# EAGLE board Quad (EAGLE 9.5.1)
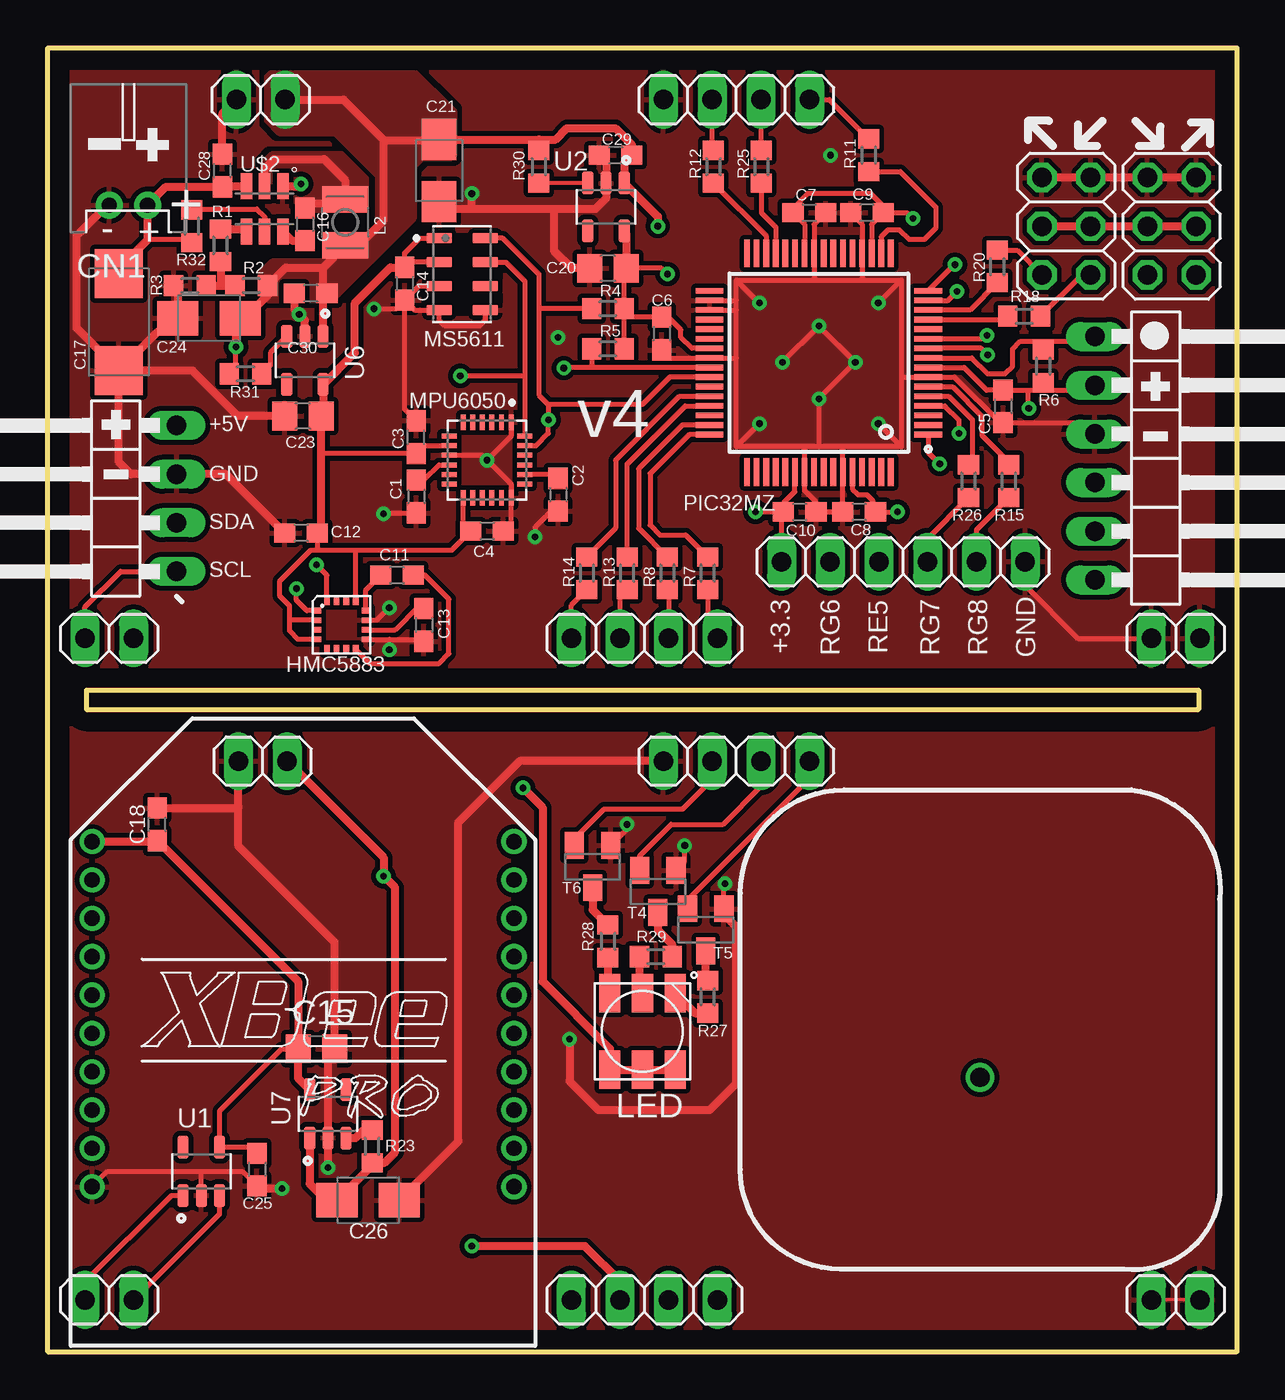
[diagram p0: board, top side]
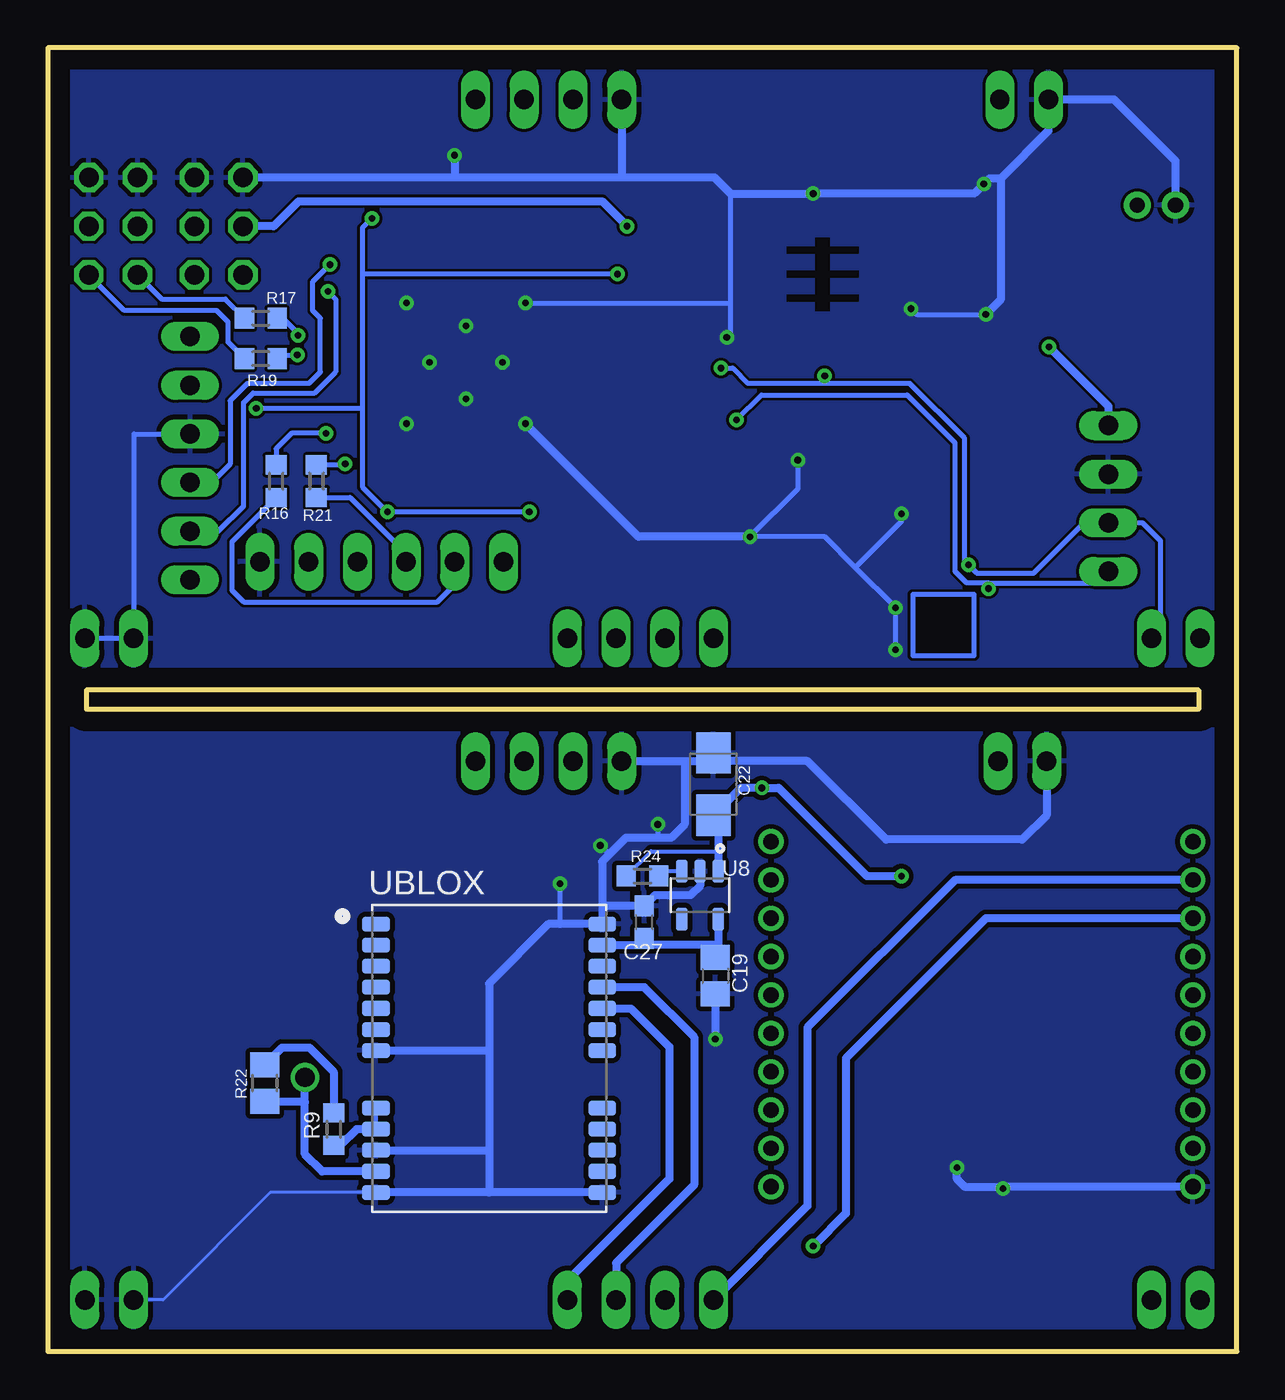
[diagram p1: board, bottom side, seen from below]

Size 62 x 68 mm. Coordinates in mm from the lower left corner, seen from the top.
Outline: 0,0 0,68 62,68 62,0 0,0
Outline: 2,34.5 60,34.5 60,33.5 2,33.5 2,34.5
Copper layers (1*16): Top 0.035mm / dielectric 1.5mm / Bottom 0.035mm
Design rules "default": minimum track width 6mil, minimum drill 0.35mm, track to track 6mil, track to pad 6mil, pad to pad 6mil, via to via 6mil, smd to smd 6mil, copper to edge 40mil, drill to drill 6mil, minimum pad ring 10mil, minimum via ring 8mil, stop-mask expansion 4mil, vias tented up to drill 0mil, thermal gap 10mil

## Footprints (pad centres in the part's own frame; a part is rotated, then mirrored left to right if it is on the bottom)
C0603 = smd 1.1 x 1: 1 -0.85,0; 2 0.85,0
C0805 = smd 1.3 x 1.5: 1 -0.95,0; 2 0.95,0
C/6032-28R = smd 2.55 x 2.5: + 2.525,0; - -2.525,0
B/3528-21W = smd 2.15 x 1.8: + 1.625,0; - -1.625,0
JST-PH-2-THM-RA = drill 0.8 pad 1.422: 1 1,0; 2 -1,0
LPCC-16 = smd 0.45 x 0.3: 1 -1.275,0.75; 2 -1.275,0.25; 3 -1.275,-0.25; 4 -1.275,-0.75; 9 1.275,-0.75; 10 1.275,-0.25; 11 1.275,0.25; 12 1.275,0.75 | smd 0.3 x 0.45: 5 -0.75,-1.275; 6 -0.25,-1.275; 7 0.25,-1.275; 8 0.75,-1.275; 13 0.75,1.275; 14 0.25,1.275; 15 -0.25,1.275; 16 -0.75,1.275
1X04 = drill 1.016 long: 1 -3.81,0; 2 -1.27,0; 3 1.27,0; 4 3.81,0
1X02 = drill 1.016 long: 1 -1.27,0; 2 1.27,0
1X06/90 = drill 1.016 long: 1 -6.35,-3.81; 2 -3.81,-3.81; 3 -1.27,-3.81; 4 1.27,-3.81; 5 3.81,-3.81; 6 6.35,-3.81
2X03 = drill 1.016 octagon: 1 -2.54,-1.27; 2 -2.54,1.27; 3 0,-1.27; 4 0,1.27; 5 2.54,-1.27; 6 2.54,1.27
1X06 = drill 1.016 long: 1 -6.35,0; 2 -3.81,0; 3 -1.27,0; 4 1.27,0; 5 3.81,0; 6 6.35,0
1X04/90 = drill 1.016 long: 1 -3.81,-3.81; 2 -1.27,-3.81; 3 1.27,-3.81; 4 3.81,-3.81
L2825P = smd 1.4 x 2.4: 1 -1.2,0; 2 1.2,0
RGBLED5050 = smd 2 x 1.1: 1 -2,1.7; 2 -2,0; 3 -2,-1.7; 4 2,-1.7; 5 2,0; 6 2,1.7
QFN50P400X400X95-24N = smd 0.79 x 0.26: 1 -1.97,1.25; 2 -1.97,0.75; 3 -1.97,0.25; 4 -1.97,-0.25; 5 -1.97,-0.75; 6 -1.97,-1.25; 13 1.97,-1.25; 14 1.97,-0.75; 15 1.97,-0.25; 16 1.97,0.25; 17 1.97,0.75; 18 1.97,1.25 | smd 0.26 x 0.79: 7 -1.25,-1.97; 8 -0.75,-1.97; 9 -0.25,-1.97; 10 0.25,-1.97; 11 0.75,-1.97; 12 1.25,-1.97; 19 1.25,1.97; 20 0.75,1.97; 21 0.25,1.97; 22 -0.25,1.97; 23 -0.75,1.97; 24 -1.25,1.97
SON125P500X300X100-8N = smd 1.31 x 0.53: 1 -1.2,1.875; 2 -1.2,0.625; 3 -1.2,-0.625; 4 -1.2,-1.875; 5 1.2,-1.875; 6 1.2,-0.625; 7 1.2,0.625; 8 1.2,1.875
QFP50P1200X1200X120-64N = smd 1.45 x 0.3: 1 -5.7,3.75; 2 -5.7,3.25; 3 -5.7,2.75; 4 -5.7,2.25; 5 -5.7,1.75; 6 -5.7,1.25; 7 -5.7,0.75; 8 -5.7,0.25; 9 -5.7,-0.25; 10 -5.7,-0.75; 11 -5.7,-1.25; 12 -5.7,-1.75; 13 -5.7,-2.25; 14 -5.7,-2.75; 15 -5.7,-3.25; 16 -5.7,-3.75; 33 5.7,-3.75; 34 5.7,-3.25; 35 5.7,-2.75; 36 5.7,-2.25; 37 5.7,-1.75; 38 5.7,-1.25; 39 5.7,-0.75; 40 5.7,-0.25; 41 5.7,0.25; 42 5.7,0.75; 43 5.7,1.25; 44 5.7,1.75; 45 5.7,2.25; 46 5.7,2.75; 47 5.7,3.25; 48 5.7,3.75 | smd 0.3 x 1.45: 17 -3.75,-5.7; 18 -3.25,-5.7; 19 -2.75,-5.7; 20 -2.25,-5.7; 21 -1.75,-5.7; 22 -1.25,-5.7; 23 -0.75,-5.7; 24 -0.25,-5.7; 25 0.25,-5.7; 26 0.75,-5.7; 27 1.25,-5.7; 28 1.75,-5.7; 29 2.25,-5.7; 30 2.75,-5.7; 31 3.25,-5.7; 32 3.75,-5.7; 49 3.75,5.7; 50 3.25,5.7; 51 2.75,5.7; 52 2.25,5.7; 53 1.75,5.7; 54 1.25,5.7; 55 0.75,5.7; 56 0.25,5.7; 57 -0.25,5.7; 58 -0.75,5.7; 59 -1.25,5.7; 60 -1.75,5.7; 61 -2.25,5.7; 62 -2.75,5.7; 63 -3.25,5.7; 64 -3.75,5.7
R0603 = smd 1 x 1.1: 1 -0.85,0; 2 0.85,0
R0805 = smd 1.3 x 1.5: 1 -0.95,0; 2 0.95,0
SOT23-EBC = smd 1 x 1.4: B 0.95,-1.1; C 0,1.1; E -0.95,-1.1
SOT95P280X145-5N = smd 1.21 x 0.59: 1 -1.255,0.95; 2 -1.255,0; 3 -1.255,-0.95; 4 1.255,-0.95; 5 1.255,0.95
SOT95P280X140-6N = smd 1.35 x 0.6: 1 -1.185,0.95; 2 -1.185,0; 3 -1.185,-0.95; 4 1.185,-0.95; 5 1.185,0; 6 1.185,0.95
XCVR_NEO-6M-GPS = smd 1.44 x 0.79: 1 -5.895,7; 2 -5.895,5.9; 3 -5.895,4.8; 4 -5.895,3.7; 5 -5.895,2.6; 6 -5.895,1.5; 7 -5.895,0.4; 8 -5.895,-2.6; 9 -5.895,-3.7; 10 -5.895,-4.8; 11 -5.895,-5.9; 12 -5.895,-7; 13 5.895,-7; 14 5.895,-5.9; 15 5.895,-4.8; 16 5.895,-3.7; 17 5.895,-2.6; 18 5.895,0.4; 19 5.895,1.5; 20 5.895,2.6; 21 5.895,3.7; 22 5.895,4.8; 23 5.895,5.9; 24 5.895,7
XBEE-PRO = drill 0.8 pad 1.27: 1 -11,9; 2 -11,7; 3 -11,5; 4 -11,3; 5 -11,1; 6 -11,-1; 7 -11,-3; 8 -11,-5; 9 -11,-7; 10 -11,-9; 11 11,-9; 12 11,-7; 13 11,-5; 14 11,-3; 15 11,-1; 16 11,1; 17 11,3; 18 11,5; 19 11,7; 20 11,9

## Placement (x,y rotation side)
C1  0.1uF  [C0603]  19.2,44.6 270 top
C2  2.2nF  [C0603]  26.6,44.7 270 top
C3  10nF  [C0603]  19.2,47.7 90 top
C4  0.1uF  [C0603]  22.9,42.8 0 top
C5  0.1uF  [C0603]  49.8,49.3 270 top
C6  0.1uF  [C0603]  32,53.1 270 top
C7  0.1uF  [C0603]  39.7,59.4 0 top
C8  0.1uF  [C0603]  42.3,43.8 180 top
C9  0.1uF  [C0603]  42.7,59.4 180 top
C10  0.1uF  [C0603]  39.2,43.8 0 top
C11  0.22uF  [C0603]  18.2,40.5 180 top
C12  0.1uF  [C0603]  13.2,42.7 180 top
C13  4.7uF  [C0603]  19.6,37.9 270 top
C14  0.1uF  [C0603]  18.6,55.7 270 top
C15  [C0805]  14,15.8 0 top
C16  0.1uF  [C0603]  13.4,58.8 270 top
C17  [C/6032-28R]  3.7,53.7 90 top
C18  0.1uF  [C0603]  5.7,27.5 90 top
C19  [C0805]  27.2,19.6 270 bottom
C20  [C0805]  29.2,56.5 180 top
C21  [B/3528-21W]  20.4,61.6 90 top
C22  [B/3528-21W]  27.3,29.6 270 bottom
C23  [C0805]  13.3,48.8 180 top
C24  [B/3528-21W]  8.4,53.9 0 top
C25  0.1uF  [C0603]  10.9,9.5 270 top
C26  [B/3528-21W]  16.7,7.9 180 top
C27  0.1uF  [C0603]  30.9,22.4 90 bottom
C28  0.1uF  [C0603]  9.1,61.6 90 top
C29  0.1uF  [C0603]  29.6,62.4 180 top
C30  0.1uF  [C0603]  13.7,55.2 180 top
CN1  [JST-PH-2-THM-RA]  4.2,59.8 0 top
HMC5883  HMC5883L  [LPCC-16]  15.3,37.9 0 top
JP1  [1X04]  31.1,2.7 0 top
JP2  [1X02]  3.2,37.2 180 top
JP3  [1X06/90]  58.4,46.6 270 top
JP4  [2X03]  53.1,58.7 90 top
JP5  [2X03]  58.6,58.7 90 top
JP8  [1X04]  35.9,30.8 180 top
JP9  [1X04]  35.9,65.3 180 top
JP10  [1X02]  11.1,65.3 180 top
JP11  [1X04]  31.1,37.2 0 top
JP12  [1X02]  3.2,2.7 180 top
JP13  [1X02]  11.2,30.8 180 top
JP14  [1X02]  58.8,2.7 0 top
JP15  [1X02]  58.8,37.2 0 top
JP16  [1X06]  44.6,41.2 180 top
JP17  [1X04/90]  2.9,44.5 90 top
L2  4.7uH  [L2825P]  15.5,58.9 90 top
LED  RGBLED5050  [RGBLED5050]  31,16.7 90 top
MPU6050  MPU-6050  [QFN50P400X400X95-24N]  22.9,46.5 270 top
MS5611  MS561101BA03-50  [SON125P500X300X100-8N]  21.6,56.2 0 top
PIC32MZ  PIC32MZ2048EFH064-I/PT  [QFP50P1200X1200X120-64N]  40.2,51.58 180 top
R1  75k  [R0603]  9,57.7 270 top
R2  41k  [R0603]  10.6,55.6 0 top
R3  7.6k  [R0603]  7.4,55.6 0 top
R4  4.7k  [R0603]  29.2,54.4 0 top
R5  4.7k  [R0603]  29.2,52.3 0 top
R6  1k  [R0603]  51.9,51.4 270 top
R7  33  [R0603]  34.4,40.6 90 top
R8  33  [R0603]  32.3,40.6 90 top
R9  22  [R0603]  47.1,11.6 90 bottom
R11  33  [R0603]  42.8,62.4 90 top
R12  33  [R0603]  34.7,61.8 90 top
R13  33  [R0603]  30.2,40.6 90 top
R14  33  [R0603]  28.1,40.6 90 top
R15  33  [R0603]  50.1,45.4 270 top
R16  33  [R0603]  50.1,45.4 270 bottom
R17  33  [R0603]  50.9,53.9 180 bottom
R18  33  [R0603]  50.9,54 0 top
R19  33  [R0603]  50.9,51.8 180 bottom
R20  33  [R0603]  49.5,56.6 90 top
R21  33  [R0603]  48,45.4 270 bottom
R22  22uH  [R0805]  50.7,14 270 bottom
R23  10k  [R0603]  16.9,10.7 270 top
R24  10k  [R0603]  31,24.8 180 bottom
R25  33  [R0603]  37.2,61.8 90 top
R26  33  [R0603]  48,45.4 270 top
R27  330  [R0603]  34.4,18.5 270 top
R28  330  [R0603]  29.2,21.4 270 top
R29  220  [R0603]  31.7,20.6 180 top
R30  10k  [R0603]  25.6,61.8 90 top
R31  10k  [R0603]  10.3,51 180 top
R32  10k  [R0603]  7.5,58.7 270 top
T4  [SOT23-EBC]  31.8,24 180 top
T5  [SOT23-EBC]  34.3,22 180 top
T6  [SOT23-EBC]  28.4,25.3 180 top
U1  CAT24C02  [SOT95P280X145-5N]  8,9.4 90 top
U2  TLV75533PDBVR  [SOT95P280X145-5N]  29.1,59.7 270 top
U6  TLV75533PDBVR  [SOT95P280X145-5N]  13.4,51.7 270 top
U7  TLV75533PDBVR  [SOT95P280X145-5N]  14.6,12.4 90 top
U8  TLV75533PDBVR  [SOT95P280X145-5N]  28,23.8 270 bottom
U$2  AP65211A  [SOT95P280X140-6N]  11.3,59.6 270 top
UBLOX  NEO-6M-GPS  [XCVR_NEO-6M-GPS]  39,15.3 0 bottom
XB2  XBEE-PRO  [XBEE-PRO]  13.3,17.6 0 top

## Library data of the parts
C1-C30 = rcl; SPICEPREFIX: C
CN1 LED = adafruit
HMC5883 = HMC5883L; AVAILABILITY: Unavailable; DESCRIPTION: Digital Compass +/- 0.8g, Lcc-16; MF: Honeywell Aerospace; MP: HMC5883L-T; PACKAGE: LCC-16 Honeywell; PRICE: None
JP1-JP5 JP8-JP17 = pinhead
L2 = rcl; SPICEPREFIX: L
MPU6050 = MPU-6050; AVAILABILITY: Unavailable; DESCRIPTION: 3-axis gyroscope, 3-axis accelerometer in a 4x4x0.9 housing; MF: TDK InvenSense; MP: MPU-6050; PACKAGE: QFN-24 InvenSense; PRICE: None
MS5611 = MS561101BA03-50; AVAILABILITY: Unavailable; DESCRIPTION: Pressure Sensor 1.44V to 3.6V 0.01bar to 1.2bar Absolute 8-Pin QFN T/R; MF: TE Connectivity; MP: MS561101BA03-50; PACKAGE: SMD-8 Measurement Specialties; PRICE: None
PIC32MZ = PIC32MZ2048EFH064-I_PT; DESCRIPTION: PIC32MZ Series 2 MB Flash 512 kB RAM 200 MHz 32-Bit Microcontroller - TQFP-64; DIGI-KEY_PART_NUMBER: PIC32MZ2048EFH064-I/PT-ND; DIGI-KEY_PURCHASE_URL: https://www.digikey.com/product-detail/en/microchip-technology/PIC32MZ2048EFH064-I-PT/PIC32MZ2048EFH064-I-PT-ND/5323563?utm_source=snapeda&utm_medium=aggregator&utm_campaign=symbol; MF: Microchip; MP: PIC32MZ2048EFH064-I/PT; PACKAGE: TQFP-64 Microchip
R1-R9 R11-R32 = rcl; SPICEPREFIX: R
T4-T6 = transistor
U1 = CAT24C02; AVAILABILITY: Unavailable; DESCRIPTION: 500mA Low-IQ Small-Size Low-Dropout _LDO_ Regulator 5-SOT-23 -40 to 125; MF: Texas Instruments; MP: TLV75533PDBVR; PACKAGE: SOT-23 Texas Instruments; PRICE: None
U2 U6-U8 = TLV75533PDBVR; AVAILABILITY: Unavailable; DESCRIPTION: 500mA Low-IQ Small-Size Low-Dropout _LDO_ Regulator 5-SOT-23 -40 to 125; MF: Texas Instruments; MP: TLV75533PDBVR; PACKAGE: SOT-23 Texas Instruments; PRICE: None
U$2 = SOT95P280X140-6N
UBLOX = NEO-6M-GPS; AVAILABILITY: Unavailable; DESCRIPTION: SMD GPS Module;; MF: u-blox; MP: NEO-6M-GPS; PACKAGE: None; PRICE: None
XB2 = maxstream; MPN: XBP24-AWI-001; OC_FARNELL: 1337916; OC_NEWARK: 42M2667

## Nets
+3V3: C5.1 C6.1 C7.1 C8.1 C9.1 C10.1 C20.1 JP3.2 JP16.6 PIC32MZ.8 PIC32MZ.19 PIC32MZ.26 PIC32MZ.39 PIC32MZ.54 PIC32MZ.60 R4.2 R5.2 R6.2 U2.5
+5V: C21.+ C24.+ C29.1 C30.1 JP4.3 JP4.4 JP5.3 JP5.4 JP10.1 JP17.4 L2.1 R2.2 R30.2 R31.2 U2.1 U6.1
+5V/1: C22.+ C26.+ JP13.1 LED.1 LED.2 LED.3 R23.2 R24.2 U7.1 U8.1
+12V: C17.+ C28.1 CN1.1 R32.2 U$2.3
ANT: R22.2 UBLOX.11
DGND: C15.2 C18.2 C19.2 C22.- C25.2 C26.- C27.2 JP8.4 JP13.2 JP14.1 JP14.2 T4.E T5.E T6.E U1.2 U7.2 U8.2 UBLOX.7 UBLOX.10 UBLOX.12 UBLOX.13 UBLOX.24 XB2.10
ESC_1: JP5.1 R19.2
ESC_2: JP5.2 R17.2
ESC_3: JP4.1 R18.2
ESC_4: JP4.2 R20.2
GND: C1.2 C2.2 C3.2 C4.2 C5.2 C6.2 C7.2 C8.2 C9.2 C10.2 C12.2 C13.2 C14.2 C17.- C20.2 C21.- C23.2 C24.- C28.2 C29.2 C30.2 CN1.2 HMC5883.9 HMC5883.11 JP3.3 JP4.5 JP4.6 JP5.5 JP5.6 JP9.4 JP10.2 JP15.1 JP15.2 JP16.1 JP17.3 MPU6050.1 MPU6050.9 MPU6050.18 MS5611.3 MS5611.4 MS5611.5 PIC32MZ.7 PIC32MZ.20 PIC32MZ.25 PIC32MZ.34 PIC32MZ.35 PIC32MZ.40 PIC32MZ.55 PIC32MZ.59 R3.1 U2.2 U6.2 U$2.1
GPIO1: JP16.5 R16.2
GPIO2: JP16.4 R21.2
GPIO3: JP16.3 R26.2
GPIO4: JP16.2 R15.2
GPS_RX: JP11.1 R14.1
GPS_RX_J: JP1.3 UBLOX.21
GPS_TX: JP11.2 R13.1
GPS_TX_J: JP1.4 UBLOX.20
LED_BLUE: JP9.1 R11.2
LED_BLUE1: JP8.1 T5.B
LED_GREEN: JP9.3 R12.2
LED_GREEN1: JP8.2 T4.B
LED_RED: JP9.2 R25.2
MCLR: JP3.1 PIC32MZ.9 R6.1
N$1: C1.1 MPU6050.10
N$2: C2.1 MPU6050.20
N$3: C11.1 HMC5883.8
N$4: C11.2 HMC5883.12
N$5: LED.5 R29.2
N$6: C13.1 HMC5883.10
N$7: LED.6 R28.2
N$8: C16.1 L2.2 U$2.2
N$9: C16.2 U$2.6
N$10: R1.1 U$2.4
N$11: R1.2 R2.1 R3.2
N$12: PIC32MZ.48 R7.2
N$13: PIC32MZ.47 R8.2
N$14: R9.2 R22.1
N$15: LED.4 R27.2
N$16: R9.1 UBLOX.9
N$17: PIC32MZ.18 R11.1
N$18: PIC32MZ.45 R13.2
N$19: PIC32MZ.44 R14.2
N$20: PIC32MZ.29 R25.1
N$21: PIC32MZ.4 R16.1
N$22: PIC32MZ.1 R21.1
N$23: PIC32MZ.11 R17.1
N$24: PIC32MZ.13 R18.1
N$25: PIC32MZ.10 R19.1
N$26: PIC32MZ.14 R20.1
N$27: R23.1 U7.3
N$28: R24.1 U8.3
N$30: PIC32MZ.5 R26.1
N$31: PIC32MZ.6 R15.1
N$32: R31.1 U6.3
N$33: R30.1 U2.3
N$34: PIC32MZ.30 R12.1
N$35: JP8.3 T6.B
N$36: R32.1 U$2.5
N$42: R28.1 T6.C
N$43: R29.1 T4.C
N$44: R27.1 T5.C
PGC: JP3.5 PIC32MZ.15
PGD: JP3.4 PIC32MZ.16
SCL: HMC5883.1 JP2.2 JP17.1 MPU6050.23 MS5611.8 PIC32MZ.42 R4.1
SCL_J: JP12.2 U1.1
SDA: HMC5883.16 JP2.1 JP17.2 MPU6050.24 MS5611.7 PIC32MZ.41 R5.1
SDA_J: JP12.1 U1.3
V+: C15.1 C18.1 C25.1 U1.4 U7.5 XB2.1
V_BCKP: UBLOX.22
VBUS: PIC32MZ.33
VCC: C3.1 C4.1 C12.1 C14.1 C23.1 HMC5883.2 HMC5883.4 HMC5883.13 MPU6050.8 MPU6050.13 MS5611.1 MS5611.2 U6.5
VDD: C19.1 C27.1 U8.5 UBLOX.23
XBEE_RX: JP11.3 R8.1
XBEE_RX_J: JP1.2 XB2.3
XBEE_TX: JP11.4 R7.1
XBEE_TX_J: JP1.1 XB2.2

## Tracks (layer width: path | path; a pad name or v marks a point on that pad's centre or on a via)
+3V3  (via drill 0.35)
  Top 0.254: C6.1 32.15,53.95 | C10.1 38.35,44.25 38.95,44.85 PIC32MZ.54 | PIC32MZ.60 41.95,45 42.25,44.7 42.7,44.7 43,44.4 43,43.8 C8.1 v44.3,43.8 | C10.1 38.35,43.55 | PIC32MZ.26 39.45,58.8 C7.1 38.85,59.65 39.6,60.4 42.9,60.4 43.55,59.75 C9.1 | C9.1 42.95,58.8 PIC32MZ.19 | v32.3,56.2 32,56.5 C20.1 30.05,56.4 R4.2 30.05,54 | v45.1,59.1 44.8,59.4 C9.1 | PIC32MZ.39 33.57,52.33 33,52.9 33,53.3 32.35,53.95 C6.1 | R5.2 30.05,54 | C6.1 30.1,53.95 30.05,54 | PIC32MZ.8 47.77,51.33 48.95,50.15 C5.1 51.1,50.15 | 51.1,50.15 51.9,50.15 | 51.9,50.15 54.33,50.15 JP3.2 | R6.2 51.9,50.15 | 51.1,50.15 51.1,49.24 v51.14,49.2 | C10.1 v36.9,43.8 | C10.1 38.25,43.7 JP16.6
  Top 0.406: U2.5 30.15,58.34 C20.1
  Bottom 0.254: 45.6,56.2 45.6,49.2 | 45.6,49.2 45.6,45.1 v44.3,43.8 v36.9,43.8 | v32.3,56.2 45.6,56.2 | v45.1,59.1 45.6,58.6 45.6,56.2 | v51.14,49.2 45.6,49.2
+5V  (via drill 0.35)
  Top 0.254: R31.2 9.8,51.35 v9.8,52.4
  Top 0.406: JP4.4 JP4.3 JP5.4 JP5.3 | 20.33,63.16 C21.+ | v31.8,58.7 31.8,59.2 U2.1 30.05,62 C29.1 30.45,62.95 29.6,63.8 27.05,63.8 26.48,63.23 25.6,63.23 | v9.8,52.4 9.8,53.67 C24.+ 10.8,53.9 10.8,54.45 11.45,55.1 R2.2 12.4,56.55 14.35,56.55 | JP10.1 15.4,65.3 17.5,63.2 | C21.+ 25.6,63.23 | U6.1 14.35,55.2 | 14.35,55.2 14.35,56.55 | 14.35,56.55 L2.1 | L2.1 16.4,57.7 | L2.1 16.2,57.7 17.5,59 17.5,63.2 | 17.5,63.2 20.38,63.2 C21.+ | R30.2 25.6,63.23 | C30.1 14.35,55.2
  Bottom 0.406: v31.8,58.7 33.1,60 48.93,60 50.23,58.7 JP4.4 | v9.8,52.4 6.71,49.31 JP17.4
  pour Top (isolate 0.254, no thermals): 11.1,55.2 11.1,56.3 11.7,56.9 14.5,56.9 14.5,58.2 16.6,58.2 17.2,58.8 17.2,61.3 15,63.5 12.1,63.5 11.4,64.2 11.4,66.5 11.9,67 18.9,67 21.2,64.7 21.2,62.4 21,62.2 19.5,62.2 19.1,61.8 19.1,59.1 14.8,54.8 11.5,54.8
+5V/1  (via drill 0.35)
  Top 0.406: C26.+ 15.45,7.9 15.55,8 15.55,8.3 14.1,8.3 13.65,8.75 U7.1 | JP13.1 17.5,25.77 v17.5,24.8 18.1,24.2 18.1,10.4 17.55,9.85 R23.2 16.9,9.73 C26.+ | 15.03,7.95 C26.+ | v24.77,29.4 25.8,28.38 25.8,19.3 29.3,15.8 LED.1 LED.2 LED.3
  Bottom 0.203: R24.2 30.55,26.1 27.05,26.1
  Bottom 0.406: U8.1 27.05,26.1 27.05,28.23 C22.+ 25.88,29.4 v24.77,29.4 23.9,29.4 19.3,24.8 v17.5,24.8 | 31.85,25.15 R24.2
+12V
  Top 0.254: R32.2 7.35,58 5.2,58
  Top 0.406: 10.27,60.78 U$2.3 9.13,60.78 C28.1 6.15,60.75 CN1.1 5.2,58 3.7,56.5 C17.+
ANT  (via drill 1)
  Bottom 0.406: UBLOX.11 47.7,9.4 48.6,10.3 48.6,13 | 48.6,13 v48.6,14.3 | R22.2 48.65,13.05 48.6,13
DGND  (via drill 0.35)
  Top 0.152: JP14.2 JP14.1
  Top 0.254: 35.25,23.65 T5.E 35.25,24.35 v35.3,24.4 | 32.09,30.11 JP8.4 | XB2.10 3.1,9.4 8,9.4 | 8,9.4 10.15,9.4 C25.2 | U1.2 8,9.4 | T6.E 30.2,27.25 v30.2,27.5 | T4.E 33.2,25.55 v33.2,26.4
  Top 0.406: v14.6,9.6 U7.2 14.6,15.45 C15.2 14.95,21.35 9.93,26.37 9.93,28.4 | JP8.4 24.6,30.8 21.4,27.6 21.4,10.98 C26.- | v12.2,8.5 11.05,8.5 C25.2 | v27.2,16.3 27.2,14.1 28.7,12.6 34.5,12.6 35.9,14 35.9,22.15 35.25,22.8 T5.E | 9.93,28.4 JP13.2 | C18.2 9.88,28.35 9.93,28.4
  Bottom 0.152: UBLOX.12 50.4,8.3 56,2.7 JP14.1
  Bottom 0.254: v30.2,27.5 30.2,26.8 | v33.2,26.4 32.88,26.08 32.58,26.08 | 35.3,22.3 v35.3,24.4
  Bottom 0.406: v14.6,9.6 14.6,9 14.2,8.6 12.1,8.6 | U8.2 28,24.3 28.5,23.8 30.35,23.8 C27.2 33.05,23.25 33.1,23.3 | 39,15.7 39,19.2 35.9,22.3 35.3,22.3 UBLOX.24 33.1,23.3 | UBLOX.7 39,15.7 | C19.2 v27.2,16.3 | XB2.10 12.1,8.6 | 12.1,8.6 v12.2,8.5 | JP13.2 9.93,27.97 11.2,26.7 18.3,26.7 22.4,30.8 26.79,30.8 C22.- 27.73,30.8 28.8,30.8 | JP8.4 28.8,30.8 | UBLOX.13 39,8.3 | 39,8.3 UBLOX.12 | 39,15.7 39,10.5 | 39,10.5 39,8.3 | UBLOX.10 39,10.5 | 28.8,30.8 28.8,27.5 29.5,26.8 30.2,26.8 31.86,26.8 32.58,26.08 33.1,25.56 33.1,23.3
  pour Top (isolate 0.254): 0,33.5 0,0 62,0 62,33.5
  pour Bottom (isolate 0.254): 0,33.5 0,0 62,0 62,33.5
ESC_1
  Bottom 0.254: R19.2 52.6,52.65 52.6,53.7 53.2,54.3 58.01,54.3 JP5.1
ESC_2
  Bottom 0.254: JP5.2 56.07,54.9 52.75,54.9 R17.2
ESC_3
  Top 0.254: R18.2 53.91,56.16 JP4.1
ESC_4
  Top 0.254: R20.2 50.54,57.45 JP4.2
GND  (via drill 0.35)
  Top 0.254: HMC5883.9 17.8,37.15 | 17.8,37.15 19.5,37.15 C13.2 | C14.2 19.12,54.33 MS5611.4 20.4,53.8 20.7,53.5 22.5,53.5 22.8,53.8 MS5611.5 | MS5611.3 19.32,55.58 C14.2 | 39.45,47.2 PIC32MZ.55 39.45,44.9 40.05,44.3 C10.2 C8.2 PIC32MZ.59 41.45,47.2 | 39.45,47.2 35.9,47.2 | 35.9,47.2 35.9,51.83 | 35.9,51.83 35.9,54.33 | 35.9,54.83 35.9,55.9 | 35.9,55.9 39.95,55.9 | 39.95,55.9 42.45,55.9 | 42.45,55.9 44.5,55.9 | 44.5,55.9 44.5,50.83 | 44.5,50.83 44.5,47.2 | 44.5,47.2 41.45,47.2 | 41.45,47.2 40.2,47.2 | 40.2,47.2 39.45,47.2 | 35.9,51.83 PIC32MZ.40 32.42,51.83 C6.2 | PIC32MZ.35 35.9,54.33 | 35.9,54.33 35.9,54.83 | PIC32MZ.34 35.9,54.83 | 39.95,55.9 PIC32MZ.25 39.95,58.8 C7.2 | 42.45,55.9 PIC32MZ.20 42.45,58.8 C9.2 | 44.5,50.83 PIC32MZ.7 47.27,50.83 49.65,48.45 C5.2 54.01,48.45 JP3.3 | v38.3,51.6 v40.2,53.5 v42.1,51.6 v40.2,49.7 40.2,47.2 | v43.3,54.7 44.5,55.9 | v43.3,48.4 44.5,47.2 | v37.1,48.4 35.9,47.2 | v37.1,54.7 35.9,55.9 | v17,54.4 18.15,54.4 C14.2 | 6.64,54.04 C24.- | HMC5883.11 17.15,38.15 v17.8,38.8 | v17.8,36.6 17.8,37.15 | MPU6050.9 22.65,46.75 v22.9,46.5 | MPU6050.1 24.15,47.75 v22.9,46.5 | v22.9,46.5 24.15,45.25 MPU6050.18 24.15,43.2 C4.2 | C3.2 18.6,49.15 C14.2 | v25.4,42.5 25.4,43 26.25,43.85 C2.2 | C1.2 19.15,43.7 v17.5,43.7 | JP15.1 53.7,37.2 50.95,39.95 JP16.1
  Top 0.406: v13.2,60.9 13.09,60.78 U$2.1 | U6.2 13.4,53.8 v13.1,54.1 12.85,54.35 C30.2 | 28.07,56.5 C20.2 27.3,56.5 26.4,57.4 26.4,59.6 | JP5.5 JP5.6 JP4.5 JP4.6 | 26.4,59.6 28.55,59.6 29.1,60.16 U2.2 29.1,62.05 C29.2 | 26.4,59.6 22.1,59.6 | 22.1,59.6 20.77,59.6 C21.- | 2.73,52.14 C17.- | C17.- 5.72,53.2 6.78,53.2 C24.- 6.78,55.38 R3.1 | C17.- 1.5,53.38 1.5,58.2 3.1,59.8 CN1.2 | C23.2 9.9,48.8 7.53,51.17 C17.- | C12.2 9.28,45.77 JP17.3 4.33,45.77 3.7,46.4 C17.- | 6.55,54.12 6.64,54.04 | C28.2 9.1,64.57 JP10.2 | 22.1,59.6 v22.1,60.4
  Bottom 0.254: v22.9,46.5 22.9,45 v25.4,42.5 21.5,42.5 19.9,40.9 | v17,54.4 16.7,54.1 v13.1,54.1 | 26.4,54.6 26.4,53.1 v26.6,52.9 | 26.4,54.6 26.4,60.4 | v17.8,36.6 v17.8,38.8 19.9,40.9 | v17.5,43.7 17.5,43.3 19.9,40.9 | JP15.2 JP15.1 57.5,37.2 57.5,47.87 JP3.3 | 26.4,54.6 26.5,54.7 v37.1,54.7
  Bottom 0.406: 12.3,61.2 12.9,61.2 v13.2,60.9 13.7,60.4 v22.1,60.4 26.4,60.4 27.24,61.24 32.1,61.24 | v13.1,54.1 12.3,54.9 12.3,61.2 | v25.4,42.5 v25.41,42.51 31.21,42.51 v37.1,48.4 | 32.1,61.24 40.8,61.24 | 40.8,61.24 JP4.6 | JP9.4 32.09,61.25 32.1,61.24 | v40.8,62.4 40.8,61.24 | CN1.2 3.2,62.1 6.4,65.3 JP10.2 9.83,63.67 12.3,61.2
  pour Top (isolate 0.254, rank 2): 0,34.5 62,34.5 62,68 0,68
  pour Bottom (rank 2): -0.3,34.5 -0.3,68 62,68 62,34.5
GPIO1
  Bottom 0.254: R16.2 52.4,42.25 52.4,39.7 51.8,39.1 41.7,39.1 40.79,40.01 JP16.5
GPIO2
  Bottom 0.254: R21.2 46.25,44.55 43.33,41.63 JP16.4
GPIO3
  Top 0.254: JP16.3 45.87,42.42 R26.2
GPIO4
  Top 0.254: R15.2 48.41,42.86 JP16.2
GPS_RX
  Top 0.254: R14.1 27.29,38.94 JP11.1
GPS_RX_J
  Bottom 0.406: UBLOX.21 30.9,19 28.31,16.41 28.31,8.69 32.37,4.63 JP1.3
GPS_TX
  Top 0.254: JP11.2 29.83,39.75 R13.1
GPS_TX_J
  Bottom 0.406: UBLOX.20 31.6,17.9 29.6,15.9 29.6,9 34.91,3.69 JP1.4
LED_BLUE
  Top 0.254: JP9.1 40.75,65.3 R11.2
LED_BLUE1
  Top 0.254: T5.B 33.35,23.55 39.71,29.91 JP8.1
LED_GREEN
  Top 0.254: R12.2 34.63,62.72 JP9.3
LED_GREEN1
  Top 0.254: T4.B 30.85,25.85 32.5,27.5 35.2,27.5 37.17,29.47 JP8.2
LED_RED
  Top 0.254: R25.2 37.2,65.27 JP9.2
MCLR
  Top 0.254: PIC32MZ.9 48.17,51.83 49,51 49.9,51 50.3,51.4 50.3,52.3 50.7,52.7 51.9,52.7 | JP3.1 54.34,52.7 51.9,52.7 | R6.1 51.9,52.7
N$1
  Top 0.254: C1.1 19.6,45.45 20.4,46.25 MPU6050.10
N$2
  Top 0.254: C2.1 26.57,45.75 MPU6050.20
N$3
  Top 0.254: HMC5883.8 16.77,35.9 20.4,35.9 20.9,36.4 20.9,39.25 19.65,40.5 C11.1
N$4
  Top 0.254: C11.2 16.57,39.73 HMC5883.12
N$5
  Top 0.406: LED.5 30.85,18.85 R29.2
N$6
  Top 0.254: HMC5883.10 18.1,37.65 19.3,38.85 19.5,38.85 C13.1
N$7
  Top 0.406: R28.2 29.2,18.8 LED.6
N$8
  Top 0.406: C16.1 13.65,59.9 15.3,59.9 L2.2 15.5,61.1 14.4,62.2 11.8,62.2 11.3,61.7 U$2.2
  pour Top (isolate 0.254, no thermals): 11.2,61 11.2,62 11.7,62.5 15.3,62.5 16.6,61.2 16.6,60.2 16.6,59.7 16.4,59.5 13.4,59.5 13.2,59.7 11.9,61
N$9
  Top 0.406: U$2.6 12.71,57.95 C16.2
N$10
  Top 0.254: R1.1 8.96,58.41
  Top 0.406: R1.1 10.21,58.55 U$2.4
N$11
  Top 0.406: R3.2 9,55.6 | 9,55.6 R2.1 | R1.2 9,55.6
N$12
  Top 0.254: R7.2 34.1,41.75 | R7.2 34.5,41.55 | PIC32MZ.48 33.43,47.83 31.4,45.8 31.4,43.1 31.9,42.6 33.25,42.6 R7.2
N$13
  Top 0.254: 32.68,41.83 R8.2 30.8,42.95 30.8,46.05 33.08,48.33 PIC32MZ.47
N$14
  Bottom 0.406: R9.2 47.1,14.6 48.35,15.85 49.8,15.85 R22.1
N$15
  Top 0.406: LED.4 33.75,17.65 R27.2
N$16
  Bottom 0.254: UBLOX.9 44.9,12.7
  Bottom 0.406: UBLOX.9 45.9,11.6 46.75,10.75 R9.1
N$17
  Top 0.254: R11.1 44.45,61.55 46.3,59.7 46.3,58.6 45.7,58 44.9,58 44.4,58.5 43.8,58.5 43.45,58.15 PIC32MZ.18
N$18
  Top 0.254: PIC32MZ.45 33.23,49.33 30.2,46.3 R13.2
N$19
  Top 0.254: R14.2 29.6,42.95 29.6,46.5 32.93,49.83 PIC32MZ.44
N$20
  Top 0.254: R25.1 37.2,59.4 37.95,58.65 PIC32MZ.29
N$21  (via drill 0.35)
  Top 0.254: PIC32MZ.4 46.77,49.33 47.5,48.6 v47.5,47.9
  Bottom 0.254: v47.5,47.9 49.3,47.9 50.1,47.1 R16.1
N$22  (via drill 0.35)
  Top 0.254: PIC32MZ.1 45.9,46.9 v46.5,46.3
  Bottom 0.254: v46.5,46.3 46.55,46.25 R21.1
N$23  (via drill 0.35)
  Top 0.254: PIC32MZ.11 48.79,52.83 v48.96,53
  Bottom 0.254: v48.96,53 48.96,53.1 49.76,53.9 R17.1
N$24
  Top 0.254: 49.95,53.9 R18.1 49.88,53.83 PIC32MZ.13
N$25  (via drill 0.35)
  Top 0.254: v49,51.99 48.66,52.33 PIC32MZ.10
  Bottom 0.254: R19.1 49.86,51.99 v49,51.99
N$26
  Top 0.254: R20.1 48.08,54.33 PIC32MZ.14
N$27
  Top 0.406: U7.3 16.05,11.14 16.45,11.55 R23.1
N$28
  Bottom 0.203: U8.3 29.89,25.05
  Bottom 0.406: 29.89,25.05 R24.1
N$29
  Bottom 0.254: 13.7,39.5 16.9,39.5 16.9,36.3 13.7,36.3 13.7,39.5
N$30
  Top 0.254: PIC32MZ.5 46.97,49.83 48.2,48.6 48.2,47.6 48.2,47.4 48.2,46.45 R26.1
N$31
  Top 0.254: PIC32MZ.6 47.17,50.33 48.7,48.8 48.7,47.8 50.1,46.4 R15.1
N$32
  Top 0.254: U6.3 11.6,52.11 11.6,51.45 R31.1
N$33
  Top 0.203: U2.3 R30.1
N$34
  Top 0.254: R12.1 37.45,58.2 PIC32MZ.30
N$35
  Top 0.254: T6.B 27.45,26.75 29,28.3 33.1,28.3 34.63,29.83 JP8.3
N$36
  Top 0.254: U$2.5 11.3,59.2 10.9,59.6 7.55,59.6 R32.1
N$42
  Top 0.254: 28.3,24.1 T6.C
  Top 0.406: R28.1 28.4,23.05 T6.C
N$43
  Top 0.406: R29.1 32.55,21.25 31.8,22 T4.C
N$44
  Top 0.254: T5.C 34.4,20.8
  Top 0.406: R27.1 34.3,19.45 T5.C
PGC  (via drill 0.35)
  Top 0.254: PIC32MZ.15 46.93,54.83 v47.4,55.3
  Bottom 0.254: v47.4,55.3 47,54.9 47,51.1 48.1,50 51.3,50 51.8,49.5 51.8,44.1 53.11,42.79 JP3.5
PGD  (via drill 0.35)
  Top 0.254: v47.3,56.7 47.27,56.7 PIC32MZ.16
  Bottom 0.254: v47.3,56.7 48.2,55.8 48.2,54.3 47.8,53.9 47.8,51.1 48.4,50.5 51.6,50.5 52.5,49.6 52.5,46.3 53.47,45.33 JP3.4
SCL  (via drill 0.35)
  Top 0.254: HMC5883.1 13.51,38.65 12.96,39.2 v12.96,39.8 | MS5611.8 23.73,58.08 25.6,56.2 25.6,54.4 | R4.1 25.6,54.4 | PIC32MZ.42 32.43,50.83 31,49.4 26.1,49.4 | 25.6,54.4 25.6,49.9 26.1,49.4 | 26.1,49.4 v26.1,48.6 26.1,47.9 25.45,47.25 MPU6050.23 | JP2.2 1.93,38.83 3.79,40.69 JP17.1
  Bottom 0.254: 12.96,40.1 7.3,40.1 JP17.1 | 12.96,40.1 14.1,40.1 14.7,40.7 14.7,47.4 17.2,49.9 24.8,49.9 v26.1,48.6 | 12.96,40.1 v12.96,39.8
SCL_J
  Top 0.254: JP12.2 1.93,3.63 6.45,8.14 U1.1
SDA  (via drill 0.35)
  Top 0.254: HMC5883.16 14.55,40.49 v14,41.04 | MS5611.7 23.88,56.83 24.87,55.83 24.87,50.9 | 24.87,50.9 MPU6050.24 | v21.5,50.9 24.87,50.9 | PIC32MZ.41 28.3,51.33 | 28.3,51.33 26.93,51.33 v26.9,51.3 | R5.1 28.35,51.38 28.3,51.33
  Bottom 0.254: v26.9,51.3 26.3,51.3 25.5,50.5 21.6,50.5 | 21.6,50.5 17.06,50.5 14.2,47.64 14.2,41.24 v14,41.04 13.56,40.6 10.6,40.6 7.97,43.23 JP17.2 4.93,43.23 4,42.3 4,37.67 JP2.1 | 21.6,50.5 21.5,50.6 v21.5,50.9
SDA_J
  Top 0.254: JP12.1 8.95,7.18 U1.3
V+
  Top 0.254: C15.1 12.2,15.8 8.95,12.55 U1.4 10.6,10.66 C25.1
  Top 0.406: U7.5 13.05,14.25 C15.1 13.05,19.3 C18.1 5.65,26.6 XB2.1
VCC
  Top 0.254: HMC5883.4 13.05,37.15 12.6,37.6 12.6,38.1 | C14.1 18.88,56.83 MS5611.2 | C14.1 18.6,56.5 | 16,41.8 16.05,41.75 HMC5883.13 | 14.1,41.8 13.7,41.8 12.1,40.2 12.1,39.4 12.6,38.9 12.6,38.1 | 14.1,41.8 16,41.8 | HMC5883.2 12.65,38.15 12.6,38.1 | MPU6050.8 19.65,47.25 C3.1 14.3,46.85 14.25,46.9 | MPU6050.13 21.65,43.2 C4.1 21.05,41.8 16,41.8 | C12.1 14.05,41.85 14.1,41.8 | C14.1 18.6,57.3 19.38,58.08 MS5611.1
  Top 0.406: C12.1 14.25,42.9 14.25,46.9 C23.1 14.35,48.9 U6.5 16,52.09 16,54.7 17.85,56.55 C14.1
VDD
  Bottom 0.406: C19.1 27.05,20.7 27.05,21.2 | U8.5 27.05,21.2 | UBLOX.23 31.25,21.2 | 31.25,21.2 C27.1 | 27.05,21.2 31.25,21.2
XBEE_RX
  Top 0.254: R8.1 32.37,39.75 JP11.3
XBEE_RX_J  (via drill 0.35)
  Top 0.406: v22.1,5.5 28,5.5 29.83,3.67 JP1.2
  Bottom 0.406: XB2.3 13.1,22.6 20.4,15.3 20.4,7.2 v22.1,5.5
XBEE_TX
  Top 0.254: R7.1 34.4,38 34.4,37.71 JP11.4
XBEE_TX_J
  Bottom 0.406: XB2.2 14.7,24.6 22.4,16.9 22.4,7.6 JP1.1

## Text on the board
tPlace: +3.3 | RG6 | RE5 | RG7 | RG8 | GND
tNames: + | +5V | v4 | GND | SDA | SCL